# Altium PCB Test Board_CC1101(NEW).PcbDoc
Units mm, origin at the board's own origin, x right, y up, seen from the top; angles counter-clockwise.
Board outline 50 x 42 mm, 2 copper layers (Top Layer, Bottom Layer); 27 components, 25 nets, 98 pads, 35 vias.
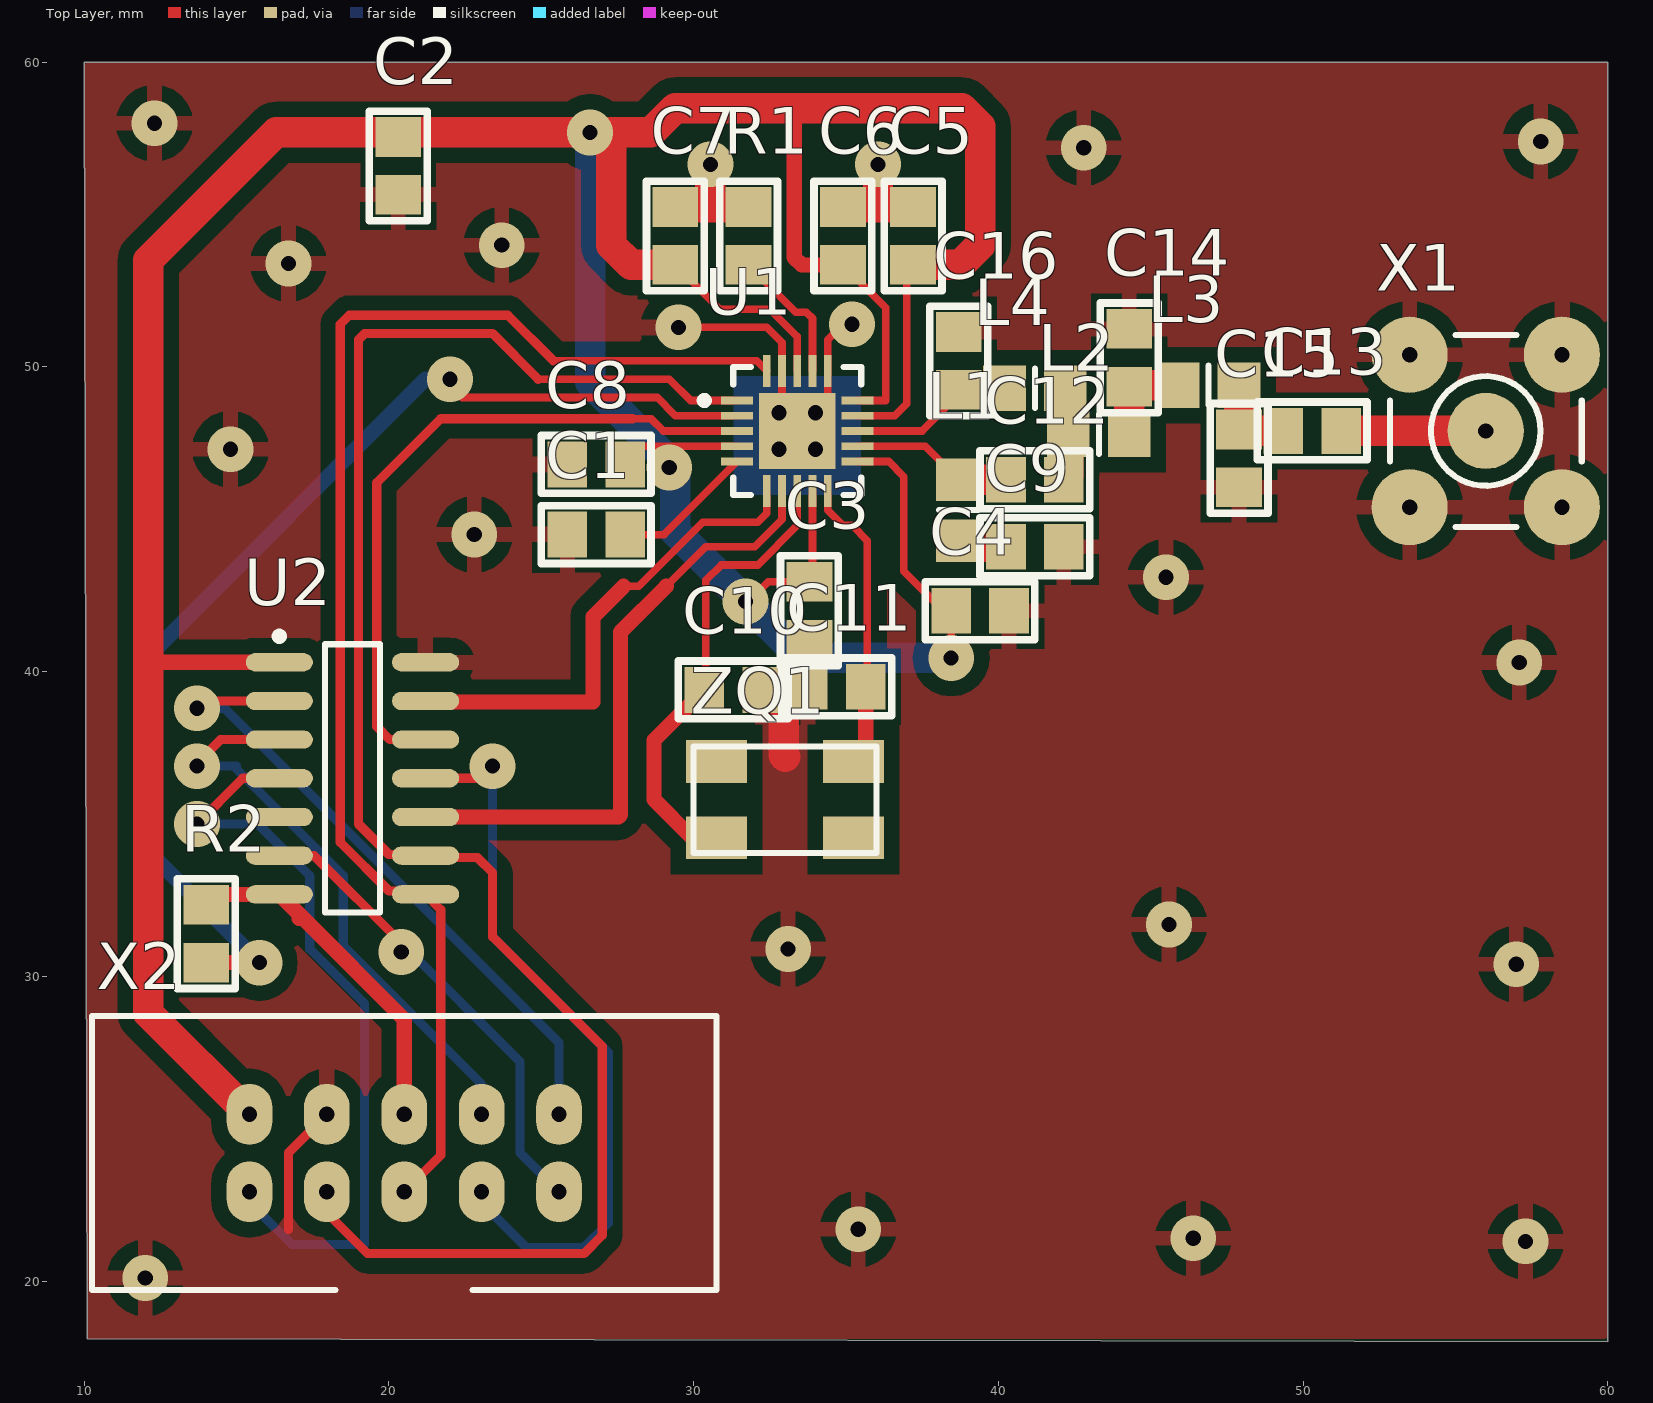
[diagram p0: Top Layer view]
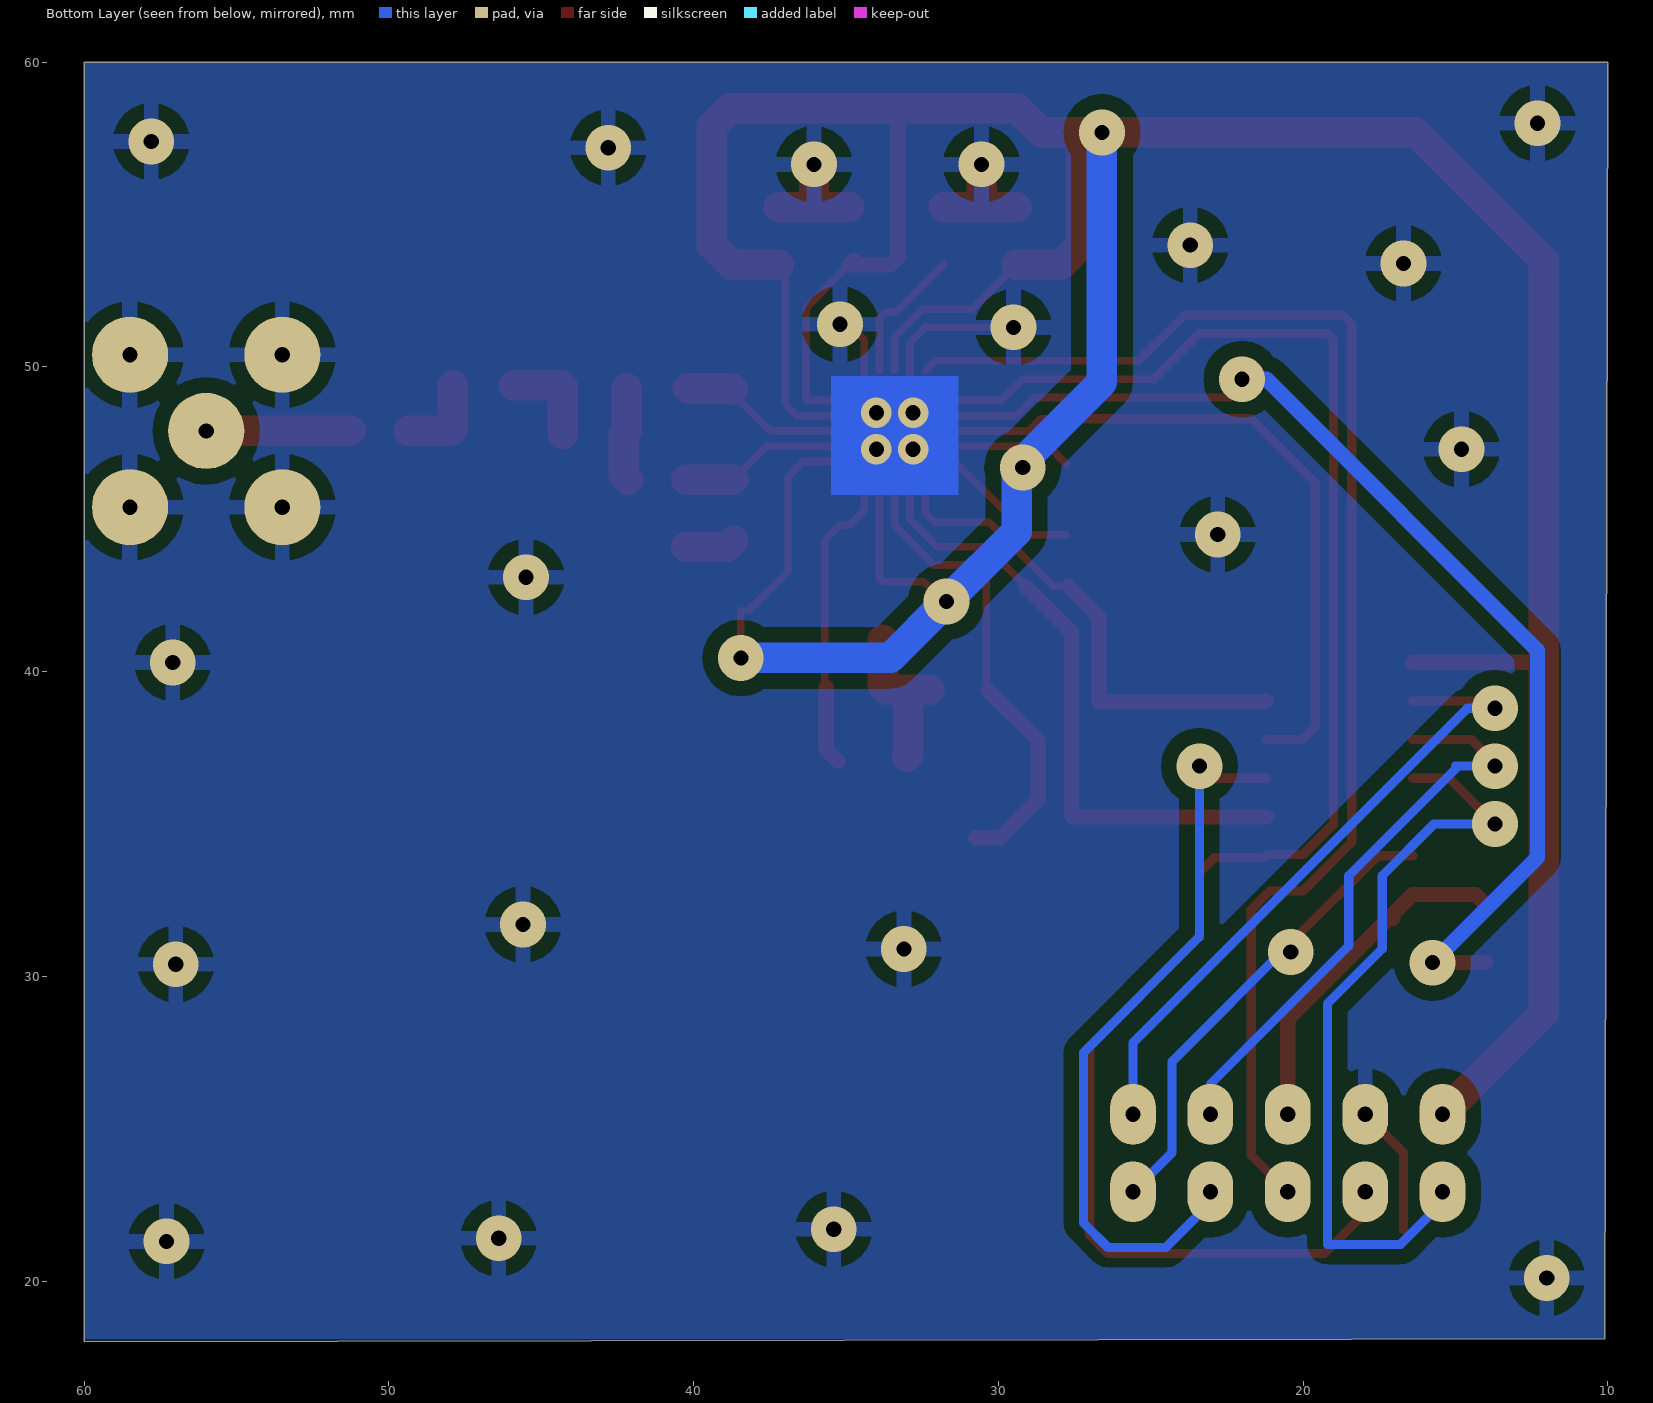
[diagram p1: Bottom Layer view, seen from below]

## Layer stack, top to bottom
Top Layer: signal copper 0.0356
Dielectric: dielectric 0.32, FR-4, Dk 4.8
Bottom Layer: signal copper 0.0356

## Board outline
10.1,18.1 60,18 60,60 10,60

## Design rules (kind name [scope] priority, off if disabled: settings)
Clearance "Clearance_GND_VCC +3.3" [InNet('GND') vs InNet('VCC +3.3')] p1 off: gap=0.2
Clearance Clearance_U3_Trace [(IsTrack  And IsNet)  And InRegion(3815,3770 ,4275 ,4280) vs (IsTrack  And IsNet)  And InRegion(3815,3770 ,4275 ,4280)] p2: gap=0.2
Clearance Clearance_QFP_NET [InNet('NetU1_20','NetU1_7','NetU1_6','NetU1_3','NetU1_2','NetU1_1','VCC','NetC3_2','SSCK','NetC5_1','NetC9_1','GND','NetC4_2','NetANT1_1','NetR1_2','NetC1_2','NetC12_1','NetC16_1','NetC10_2','NetC11_2','NetR2_2')  And InRegion(1060,1555 ,1606 ,2165) vs InNet('NetU1_20','NetU1_7','NetU1_6','NetU1_3','NetU1_2','NetU1_1','VCC','NetC3_2','SSCK','NetC5_1','NetC9_1','GND','NetC4_2','NetANT1_1','NetR1_2','NetC1_2','NetC12_1','NetC16_1','NetC10_2','NetC11_2','NetR2_2')  And InRegion(1060,1555 ,1606 ,2165)] p3: gap=0.2
Clearance Clearance_QFP_Pins [InComponent('U1') And IsPad] p4: gap=0.2
Clearance Clearance_GND [InPolygon] p5: gap=0.5
Clearance [All] p6: gap=0.3
ComponentClearance ComponentClearance_R1_C10 [InComponent('C10') vs InComponent('R1')] p1 off: gap=0 collisioncheckmode=3 verticalgap=0 showdistances=FALSE
ComponentClearance [All] p2 off: gap=0.3 collisioncheckmode=3 verticalgap=0.3 showdistances=FALSE
HoleSize [All] p1: absolutevalues=TRUE maxlimit=5 minlimit=0.3 maxpercent=80.000 minpercent=20.000
MinimumSolderMaskSliver [All] p1 off: minsoldermaskwidth=0.254
NetAntennae [All] p1: netantennaetolerance=50
PlaneConnect [All] p1: planeconnectstyle=Relief reliefexpansion=0.508 reliefentries=4 reliefconductorwidth=0.3 reliefairgap=0.3
PolygonConnect [All] p1: connectstyle=Relief reliefconductorwidth=0.5 reliefentries=4 polygonreliefangle="90 Angle"
RoutingCorners [All] p1: cornerstyle=45-Degree minsetback=2.54 maxsetback=5
RoutingVias [All] p1: holewidth=0.5 width=1.6 viastyle="Through Hole" minholewidth=0.3 minwidth=1 maxholewidth=1 maxwidth=2
ShortCircuit ShortCircuit_ANT1 [InComponent('ANT1')] p1: allowed=TRUE
ShortCircuit [All] p2: allowed=FALSE
SilkToSilkClearance [All] p1 off: silktosilkclearance=0.3
SilkscreenOverComponentPads [All] p1 off: minsilkscreentomaskgap=0.254
SolderMaskExpansion [All] p1: expansion=0.102
Width [All] p1: maxlimit=5 minlimit=0.2 preferedwidth=0.3
19 further rules are at their usual default settings.

## Components (designator, comment, footprint, x,y, rotation, side; value= is the part's Value field where it differs from the comment)
C1 "KONDENS_SMD" C0805 26.8,44.5 r0 top
C2 "KONDENS_SMD" C0805 20.3,56.6 r270 top
C3 "KONDENS_SMD" C0805 33.8,42 r90 top
C4 "KONDENS_SMD" C0805 39.4,42 r180 top
C5 "KONDENS_SMD" C0805 37.2,54.3 r270 top
C6 "KONDENS_SMD" C0805 34.9,54.3 r270 top
C7 "KONDENS_SMD" C0805 29.4,54.3 r270 top
C8 "KONDENS_SMD" C0805 26.8,46.8 r0 top
C9 "KONDENS_SMD" C0805 41.2,44.1 r180 top
C10 "KONDENS_SMD" C0805 31.3,39.4 r180 top
C11 "KONDENS_SMD" C0805 34.7,39.5 r0 top
C12 "KONDENS_SMD" C0805 41.2,46.3 r0 top
C13 "KONDENS_SMD" C0805 50.3,47.9 r0 top
C14 "KONDENS_SMD" C0805 44.3,50.3 r90 top
C15 "KONDENS_SMD" C0805 47.9,47 r270 top
C16 "KONDENS_SMD" C0805 38.7,50.2 r90 top
L1 "SMD_0805" 6-0805_M 38.7,45.3 r270 top
L2 "SMD_0805" 6-0805_M 43.3,47.8 r0 top
L3 "SMD_0805" 6-0805_M 46.9,49.4 r0 top
L4 "SMD_0805" 6-0805_M 41.2,49.3 r0 top
R1 "RES" C0805 31.8,54.3 r270 top
R2 "RES" C0805 14,31.4 r270 top
U1 "CC1101" VQFN20 33.4,47.9 r0 top
U2 "ATtiny44A-SSU" 14S1_N 18.8,36.5 r0 top
X1 "SMA" SMA 56,47.9 r0 top
X2 "IDC-10M" IDC-10M 20.5,24.2 r90 top
ZQ1 "SMD0603" Quartz_SMD0603 33,35.8 r180 top

## Footprints (in the part's own frame and the unit in brackets; to place one, negate y for a bottom-side part, rotate by r counter-clockwise, add the part's x,y. Pads: shape width x height; smd on the part's side, far side on the other; paste and mask are expansions set on the pad)
6-0805_M [mm] "Chip Resistor, Body 2.0x1.2mm, IPC Low Density"
  rect 1.4x1.5 smd: 1(-1,0) 2(1,0)
  silkscreen extent 0,-0.65 0,0.65, body extent -1.07,-0.7 1.07,0.7, height 0.7
14S1_N [mm] "SOIC, 14-Leads, Body 8.7x3.9mm, Pitch 1.27mm, IPC Medium Density"
  oval 2.2x0.6 smd: 1(-2.4,3.81) 2(-2.4,2.54) 3(-2.4,1.27) 4(-2.4,0) 5(-2.4,-1.27) 6(-2.4,-2.54) 7(-2.4,-3.81) 8(2.4,-3.81) 9(2.4,-2.54) 10(2.4,-1.27) 11(2.4,0) 12(2.4,1.27) 13(2.4,2.54) 14(2.4,3.81)
  silkscreen extent -2.52,-4.4 0.9,4.78, body extent -2,-4.38 2,4.38, height 1.75
C0805 [mm]
  rect 1.3x1.5 smd: 1(-0.95,0) 2(0.95,0)
  silkscreen extent -1.8,-0.95 1.8,0.95
IDC-10M [mm]
  oval 2x1.5 hole 0.5 unplated: 1(-1.27,5.08) 2(1.27,5.08) 3(-1.27,2.54) 4(1.27,2.54) 5(-1.27,0) 6(1.27,0) 7(-1.27,-2.54) 8(1.27,-2.54) 9(-1.27,-5.08) 10(1.27,-5.08)
  silkscreen extent -4.5,-10.25 4.5,10.25
Quartz_SMD0603 [mm]
  rect 2x1.4 smd: 1(-2.25,-1.25) 2(2.25,-1.25) 3(2.25,1.25) 4(-2.25,1.25)
  silkscreen extent -3,-1.75 3,1.75
SMA [mm]
  round 2.5 hole 0.5: 1(0,0) 2(-2.5,2.5) 3(2.5,2.5) 4(-2.5,-2.5) 5(2.5,-2.5)
  silkscreen extent -3.15,-3.15 3.15,3.15
VQFN20 [mm] "QFN, 20-Leads, Body 4,2x4,2mm (max), Pitch 0,50mm, IPC Low Density"
  rect 1.05x0.25 smd: 1(-1.975,1) 2(-1.975,0.5) 3(-1.975,0) 4(-1.975,-0.5) 5(-1.975,-1) 11(1.975,-1) 12(1.975,-0.5) 13(1.975,0) 14(1.975,0.5) 15(1.975,1)
  rect 0.25x1.05 smd: 6(-1,-1.975) 7(-0.5,-1.975) 8(0,-1.975) 9(0.5,-1.975) 10(1,-1.975) 16(1,1.975) 17(0.5,1.975) 18(0,1.975) 19(-0.5,1.975) 20(-1,1.975)
  rect 2.5x2.5 smd: 21(0,0)
  silkscreen extent -3.17,-2.1 2.1,2.1, body extent -2.07,-2.07 2.07,2.07, height 0.8

## Part data
L1 L2 L3 L4: library part Induktor_0805
R1 R2: "Resistor"
U2: "8-bit AVR Microcontroller, 1.8-5.5V, 4KB Flash, 256 Bytes EEPROM, 256 Bytes SRAM, 14-pin SOIC, Industrial Grade (-40°C to 85°C), Pb-Free"
ZQ1: library part Quartz_SMD0603

## Via types
v1: diameter 1.5, hole 0.5, Top Layer to Bottom Layer, 31 vias
v2: diameter 1, hole 0.5, Top Layer to Bottom Layer, tented top, 4 vias

## Nets (pads, with @x,y where several pads share a name; then routed paths per layer and width w, separated by ;. In a path a pad name is that pad's centre, name@x,y a point inside that pad or via, vN(x,y) a via of type N, cw(c..) or ccw(c..) an arc to the next point about the centre after c; other vN are vias at no path point)
GND: C1.1 C2.2 C3.1 C4.1 C5.1 C6.1 C7.1 C8.1 C9.1 C10.1 C11.1 C14.2 C15.2 C16.2 R1.1 U1.16 U1.19 U1.21 U2.14 X1.2 X1.3 X1.4 X1.5 X2.4 | length 28.7
  Top Layer w0.25: v1(29.5,51.3) 32.4,51.3 32.9,50.8 U1.19 32.9,48.4 U1.21 34.4,48.9 U1.16 34.4,50.9 34.9,51.4 v1(35.2,51.4)
  Top Layer w0.3: 16.7,21.7 16.7,24.21 X2.4
  Top Layer w1: C7.1 30.55,55.25 ; v1(30.55,56.65) 30.55,55.25 ; R1.1 30.55,55.25 ; C10.1 32.95,39.4 ; 33,37.2 32.95,37.25 32.95,39.4 ; C3.1 33.8,39.55 C11.1 33.65,39.4 32.95,39.4 ; C6.1 36.05,55.25 ; v1(36.05,56.65) 36.05,55.25 ; C5.1 36.05,55.25
  Bottom Layer w0.25: v1@34.9,51.4 v1(35.2,51.4)
  Bottom Layer w1: v1@30.5,56.7 v1(30.55,56.65) ; v1(36.05,56.65) v1@36.1,56.7
  other v1: 12,20.1 57.3,21.3 46.4,21.4 35.4,21.7 57,30.4 33.1,30.9 45.6,31.7 57.1,40.3 45.5,43.1 22.8,44.5 14.8,47.3 16.7,53.4 23.7,54 42.8,57.2 57.8,57.4 12.3,58
  other v2: 32.8,47.3 34,47.3 32.8,48.5 34,48.5
NetC1_2: C1.2 U1.5 | length 4.7
  Top Layer w0.25: C1.2 29.025,44.5 U1.5
NetC9_2: C9.2 L1.2 | length 1.6
  Top Layer w1: L1.2 38.9,44.1 C9.2
NetC10_2: C10.2 U1.8 ZQ1.3 | length 15.3
  Top Layer w0.25: C10.2 30.4,39.45 30.4,43 30.9,43.5 32.1,43.5 33.4,44.8 U1.8
  Top Layer w0.5: C10.2 28.7,37.75 28.7,35.8 29.95,34.55 ZQ1.3
NetC11_2: C11.2 U1.10 ZQ1.1 | length 9.8
  Top Layer w0.25: U1.10 34.4,45.3 34.9,44.8 35.2,44.8 35.7,44.3 35.7,39.55 C11.2
  Top Layer w0.5: ZQ1.1 35.65,37.45 C11.2
NetC12_1: C12.1 L1.1 U1.12 | length 5.3
  Top Layer w0.25: U1.12 37.6,47.4 L1.1
  Top Layer w1: L1.1 C12.1
NetC12_2: C12.2 L2.1 L4.2 | length 3.1
  Top Layer w1: C12.2 42.3,46.45 L2.1 42.2,47.9 L4.2
NetC13_1: C13.1 C15.1 L3.2 | length 2.9
  Top Layer w1: L3.2 C15.1 47.95,47.9 C13.1
NetC13_2: C13.2 X1.1 | length 4.7
  Top Layer w1: C13.2 X1.1
NetC14_1: C14.1 L2.2 L3.1 | length 3.2
  Top Layer w1: L2.2 C14.1 44.35,49.4 L3.1
NetC16_1: C16.1 L4.1 U1.13 | length 5.8
  Top Layer w0.25: U1.13 37.5,47.9 38.75,49.15 38.75,49.3 C16.1@38.5,49.3
  Top Layer w1: C16.1 38.75,49.3 L4.1
NetR1_2: R1.2 U1.17 | length 4.5
  Top Layer w0.25: R1.2 33.35,51.8 33.7,51.8 33.9,51.6 U1.17
NetR2_1: R2.1 U2.7 X2.6 | length 11.6
  Top Layer w0.5: R2.1 14.34,32.69 U2.7 17.19,31.9 ; 17.05,31.9 17.19,31.9 ; X2.6 20.5,28.59 17.19,31.9
NetR2_2: R2.2 U1.2 | length 36.9
  Top Layer w0.25: v1(22,49.6) 22,49.4 22.4,49 28.8,49 29.4,48.4 U1.2
  Top Layer w0.5: R2.2 v1(15.75,30.45)
  Bottom Layer w0.5: v1@15.8,30.4 v1(15.75,30.45) 12.3,33.9 12.3,40.7 21.2,49.6 v1(22,49.6)
NetU1_1: U1.1 U2.9 X2.3 | length 58.3
  Top Layer w0.25: 24.9,49.6 29.2,49.6 29.9,48.9 U1.1
  Top Layer w0.3: X2.3 17.96,22.24 19.3,20.9 26.4,20.9 27,21.5 27,27.7 23.4,31.3 23.4,33.4 22.9,33.9 21.26,33.9 U2.9 21.16,34 20,34 19,35 19,50.9 19.2,51.1 23.4,51.1 24.9,49.6
NetU1_3: U1.3 U2.12 | length 22.6
  Top Layer w0.25: 28,48.3 28.6,48.3 29,47.9 U1.3
  Top Layer w0.3: U2.12 20.03,37.77 19.6,38.2 19.6,46.2 21.7,48.3 28,48.3
NetU1_6: U1.6 U2.13 | length 16.1
  Top Layer w0.25: 27.7,42.8 28.2,42.8 30.3,44.9 32.1,44.9 32.4,45.2 U1.6
  Top Layer w0.5: U2.13 21.24,39 26.7,39 26.7,41.8 27.7,42.8
NetU1_7: U1.7 U2.10 | length 20.2
  Top Layer w0.25: 29.1,42.8 30.4,44.1 32,44.1 32.9,45 U1.7
  Top Layer w0.5: U2.10 27.53,35.23 27.6,35.3 27.6,41.3 29.1,42.8
NetU1_20: U1.20 U2.8 X2.5 | length 45.9
  Top Layer w0.25: 25.4,50.2 32.075,50.2 U1.20
  Top Layer w0.3: X2.5 21.7,24.13 21.7,32.19 U2.8 21.09,32.8 20,32.8 18.4,34.4 18.4,51.4 18.7,51.7 23.9,51.7 25.4,50.2
NetU2_2: U2.2 X2.10 | length 22.2
  Top Layer w0.3: v1(13.7,38.8) 13.7,39 13.74,39.04 U2.2
  Bottom Layer w0.3: v1@13.5,38.8 13.7,39 v1(13.7,38.8) 14.6,38.8 25.58,27.82 X2.10
NetU2_3: U2.3 X2.8 | length 19.5
  Top Layer w0.3: v1(13.7,36.9) 13.6,36.9 14.47,37.77 U2.3
  Bottom Layer w0.3: v1@13.8,36.8 v1(13.7,36.9) 15,36.9 15,36.8 18.5,33.3 18.5,31 23.04,26.46 X2.8
NetU2_4: U2.4 X2.1 | length 25.3
  Top Layer w0.3: v1(13.7,35) 15.2,36.5 U2.4
  Bottom Layer w0.3: v1(13.7,35) 15.7,35 17.4,33.3 17.4,30.9 19.2,29.1 19.2,21.2 16.8,21.2 15.42,22.58 X2.1
NetU2_6: U2.6 X2.9 | length 16.1
  Top Layer w0.3: U2.6 17.54,33.96 20.4,31.1 v1(20.4,30.8)
  Bottom Layer w0.3: v1(20.4,30.8) 20.4,31.1 24.3,27.2 24.3,24.21 X2.9
NetU2_11: U2.11 X2.7 | length 24.4
  Top Layer w0.3: U2.11 23,36.5 v1(23.4,36.9)
  Bottom Layer w0.3: X2.7 23.04,22.56 24.5,21.1 26.4,21.1 27.2,21.9 27.2,27.5 23.4,31.3 v1(23.4,36.9)
VCC: C2.1 C3.2 C4.2 C5.2 C6.2 C7.2 C8.2 U1.4 U1.9 U1.11 U1.14 U1.15 U1.18 U2.1 X2.2 | length 144.9
  Top Layer w0.25: C8.2 28.35,47.4 v1@29.1,47.4 ; v1(29.2,46.7) 29.1,46.7 v1@29.1,47.4 ; C7.2 30.85,51.9 32.5,51.9 33.4,51 U1.18 ; U1.4 v1@29.1,47.4 ; v1(31.7,42.3) 31.8,42.3 32.45,42.95 C3.2 33.9,43.05 U1.9 ; C6.2 36.3,51.95 36.3,48.9 U1.15 ; U1.11 36.4,46.9 36.9,46.4 36.9,43.3 38.2,42 C4.2 v1(38.45,40.45) ; U1.14 36.6,48.4 37,48.8 37,53.15 C5.2
  Top Layer w0.5: 12.1,40.4 12.19,40.31 U2.1 ; 33.2,58.5 33.3,58.4 33.3,53.6 33.55,53.35 C6.2 C6.2@34.75,53.5
  Top Layer w1: X2.2 12.1,28.79 12.1,40.4 12.1,53.5 16.3,57.7 v1(26.6,57.7) 27.4,57.7 ; C7.2 27.95,53.35 27.3,54 27.3,57.6 27.4,57.7 ; C5.2 38.75,53.35 39.4,54 39.4,57.9 38.8,58.5 33.2,58.5 29.4,58.5 28.6,57.7 27.4,57.7
  Bottom Layer w0.25: v1@29.1,46.7 v1(29.2,46.7)
  Bottom Layer w1: v1(26.6,57.7) 26.6,49.5 29.25,46.85 29.4,46.7 29.4,44.6 v1(31.7,42.3) 33.55,40.45 v1(38.45,40.45)
pads on no net: U2.5 ZQ1.2 ZQ1.4

## Polygon pours and split planes (outlines as drawn)
GND on Top Layer "TOP" (solid, remove dead copper, pour order 4): 10,60 60,60 60,18 59.9,18.1 10.1,18.1
GND on Bottom Layer "BOT" (solid, remove dead copper, pour order 6): 10,60 60,60 60,18.1 10.1,18.1

## Other copper
Bottom Layer:
  rectangle net GND: 31.3,45.8 35.5,49.7